# EAGLE board DualBalancedInput (EAGLE 7.5.0)
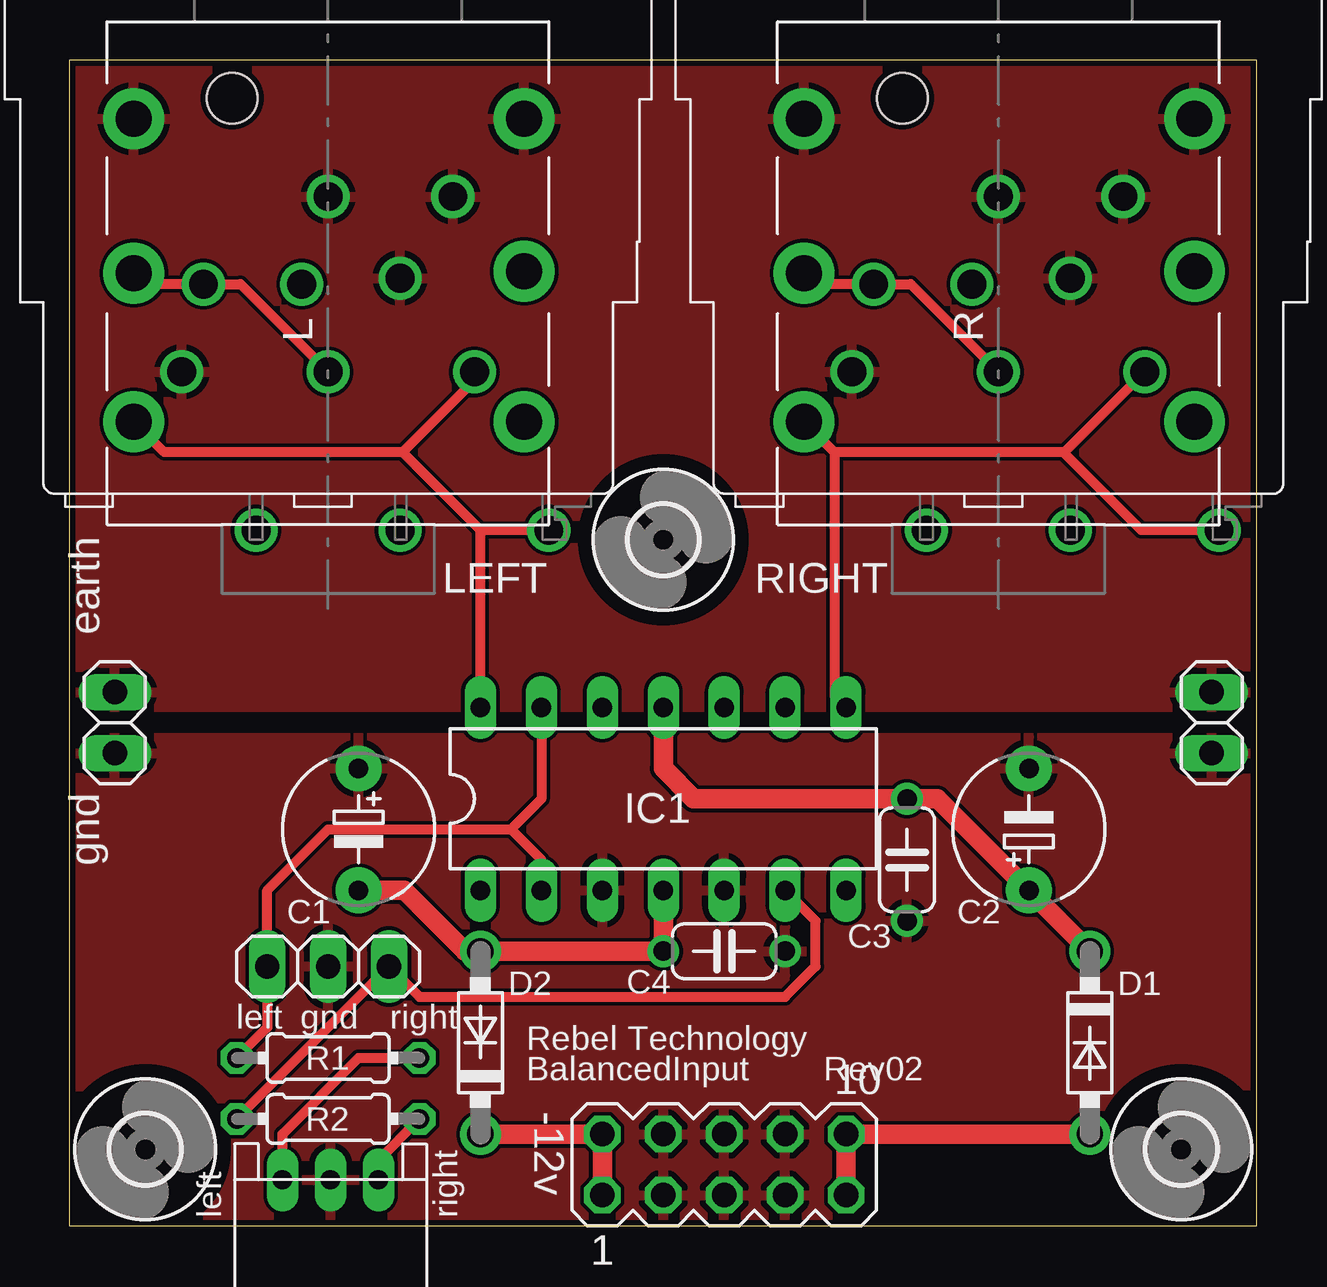
[diagram p0: board, top side]
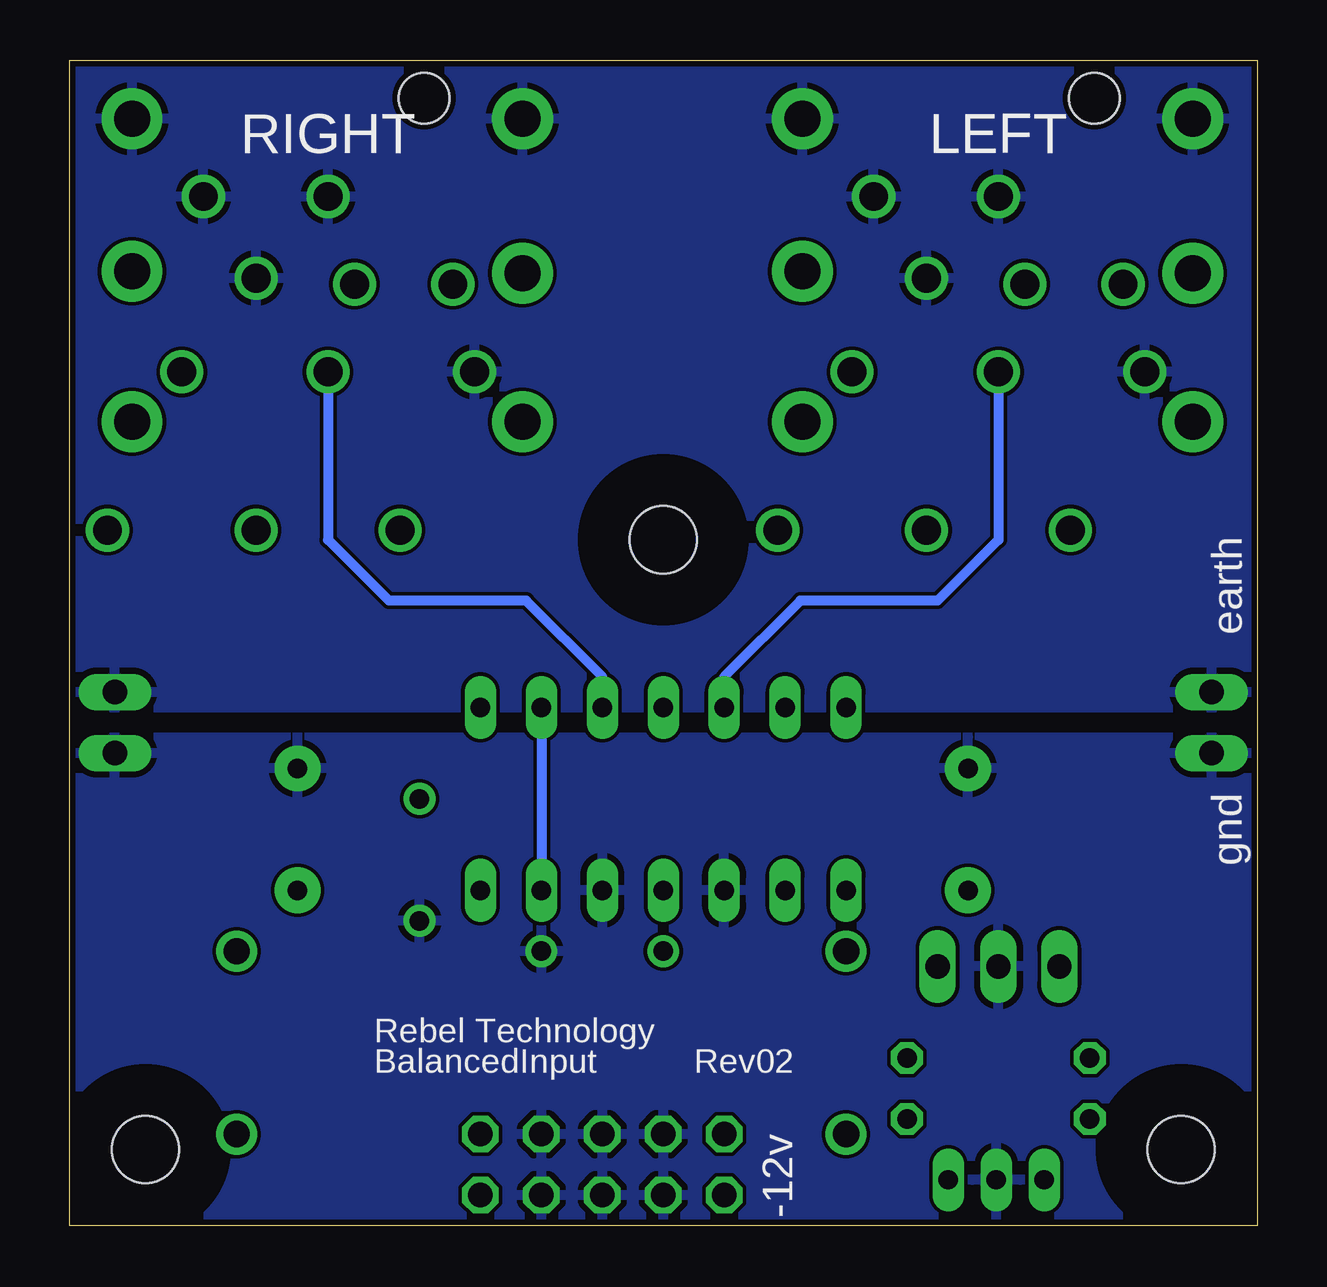
[diagram p1: board, bottom side, seen from below]

Size 49.51 x 48.56 mm. Coordinates in mm from the lower left corner, seen from the top.
Outline: 0,0 49.51,0 49.51,48.56 0,48.56 0,0
Copper layers (1*16): Top 0.035mm / dielectric 1.5mm / Bottom 0.035mm
Design rules "Fusion_eagle_rule_v1.1": minimum track width 6mil, minimum drill 12mil, track to track 6mil, track to pad 6mil, pad to pad 6mil, via to via 6mil, smd to smd 0mil, copper to edge 10mil, drill to drill 10mil, minimum pad ring 10mil, minimum via ring 6mil, stop-mask expansion 2mil, vias tented up to drill 100mil, thermal gap 10mil

## Footprints (pad centres in the part's own frame; a part is rotated, then mirrored left to right if it is on the bottom)
E5-6 = drill 0.813 pad 1.905: + -2.54,0; - 2.54,0
C050-024X044 = drill 0.813: 1 -2.54,0; 2 2.54,0
DO41-7.6 = drill 1.1 pad 1.7: A 3.81,0; C -3.81,0
DIL14 = drill 0.813 long: 1 -7.62,-3.81; 2 -5.08,-3.81; 3 -2.54,-3.81; 4 0,-3.81; 5 2.54,-3.81; 6 5.08,-3.81; 7 7.62,-3.81; 8 7.62,3.81; 9 5.08,3.81; 10 2.54,3.81; 11 0,3.81; 12 -2.54,3.81; 13 -5.08,3.81; 14 -7.62,3.81
CON-JST_PH_3W = drill 0.8 long: P1 0,0; P2 -2,0; P3 -4,0
1X02 = drill 1.016 long: 1 -1.27,0; 2 1.27,0
1X03 = drill 1.016 long: 1 -2.54,0; 2 0,0; 3 2.54,0
NMJ6HCD2 = drill 1.5 pad 2.54: R -0.318,8.096; RN -0.238,-8.176; S 6.112,8.096; SN 6.112,-8.176; T -6.509,8.096; TN -6.509,-8.176
NCJ10FI-H = drill 1.2: 1 -6.1,-18.4; 2 6.1,-18.4; 3 0,-18.4; G 0,-11.1; GN -1.1,-14.75; R -5.2,-14.75; RS -3,-25; S 5.2,-11.1; SS 3,-14.5; T 9.2,-25; TS 3,-25 | hole 2.1: -4,-7
0204/7 = drill 0.813 octagon: 1 -3.81,0; 2 3.81,0
MA05-2 = drill 1.016 octagon: 1 -5.08,-1.27; 2 -5.08,1.27; 3 -2.54,-1.27; 4 -2.54,1.27; 5 0,-1.27; 6 0,1.27; 7 2.54,-1.27; 8 2.54,1.27; 9 5.08,-1.27; 10 5.08,1.27
2,8 = hole 2.8: 0,0

## Placement (x,y rotation side)
C1  10u  [E5-6]  12.06,16.51 270 top
C2  10u  [E5-6]  40.01,16.51 90 top
C3  100n  [C050-024X044]  34.92,15.24 270 top
C4  100n  [C050-024X044]  27.3,11.43 0 top
D1  1N5817  [DO41-7.6]  42.55,7.62 270 top
D2  1N5817  [DO41-7.6]  17.14,7.62 90 top
IC1  INA2137P  [DIL14]  24.77,17.78 0 top
J1  CON-JST_PH_3W  [CON-JST_PH_3W]  8.89,1.91 180 top
JP1  [1X02]  1.91,20.95 270 top
JP2  [1X03]  10.79,10.79 180 top
JP3  [1X02]  47.62,20.95 270 top
L  NEUTRIK_NMJ6HCD2  [NMJ6HCD2]  10.79,40.01 90 top
LEFT  NCJ10FI-H  [NCJ10FI-H]  10.79,53.98 0 top
R  NEUTRIK_NMJ6HCD2  [NMJ6HCD2]  38.73,40.01 90 top
R1  100R  [0204/7]  10.79,6.99 0 top
R2  100R  [0204/7]  10.79,4.45 0 top
RIGHT  NCJ10FI-H  [NCJ10FI-H]  38.73,53.98 0 top
SV1  [MA05-2]  27.3,2.54 0 top
U$1  [2,8]  3.17,3.17 0 top
U$2  [2,8]  46.35,3.17 0 top
U$3  [2,8]  24.77,28.57 0 top

## Library data of the parts
C1-C4 = rcl
D1 D2 = diode
IC1 = burr-brown; MF: TEXAS INSTRUMENT CONNECTORS; MPN: INA2137PA; OC_FARNELL: unknown; OC_NEWARK: 18M9116
J1 R1 R2 = Rebel
JP1-JP3 = pinhead
L R = neutrik_jacks
LEFT RIGHT = con-neutrik_ag; OC_FARNELL: unknown; OC_NEWARK: unknown
SV1 = con-lstb; OC_FARNELL: unknown; OC_NEWARK: unknown
U$1-U$3 = holes

## Nets
+12V: C2.+ C3.1 D1.C IC1.11
-12V: C1.- C4.1 D2.A IC1.4
GND: C1.+ C2.- C3.2 C4.2 IC1.3 IC1.5 J1.P2 JP1.2 JP2.2 JP3.2 SV1.3 SV1.4 SV1.5 SV1.6 SV1.7 SV1.8
GNDA: JP1.1 JP3.1 L.S L.SN LEFT.1 LEFT.G LEFT.S LEFT.SS R.S R.SN RIGHT.1 RIGHT.G RIGHT.S RIGHT.SS
IN_LEFT: IC1.2 IC1.13 JP2.3 R1.1
IN_RIGHT: IC1.6 IC1.9 JP2.1 R2.1
N$1: IC1.14 L.T LEFT.2 LEFT.T
N$2: IC1.12 L.R LEFT.3 LEFT.R
N$5: D2.C SV1.1 SV1.2
N$6: D1.A SV1.9 SV1.10
N$7: J1.P3 R2.2
N$9: J1.P1 R1.2
N$18: IC1.8 R.T RIGHT.2 RIGHT.T
N$19: IC1.10 R.R RIGHT.3 RIGHT.R

## Tracks (layer width: path | path; a pad name or v marks a point on that pad's centre or on a via)
+12V
  Top 0.813: IC1.11 24.77,19.05 26.04,17.78 C3.1 36.2,17.78 C2.+ D1.C
-12V
  Top 0.813: IC1.4 C4.1 D2.A 16.51,11.43 13.97,13.97 C1.-
GND
  pour Bottom: -4.45,20.32 59.05,20.32 59.05,-3.17 -4.45,-3.17
  pour Top: -5.71,20.32 57.78,20.32 57.78,-3.17 -5.71,-3.17
GNDA
  pour Bottom: -4.45,21.59 -4.45,51.44 59.05,51.44 59.05,21.59
  pour Top: -5.71,21.59 -5.71,51.44 57.78,51.44 57.78,21.59
IN_LEFT
  Top 0.406: 18.41,16.51 10.79,16.51 8.26,13.97 JP2.3 8.26,8.26 R1.1 | 18.41,16.51 19.68,15.24 IC1.2 | IC1.13 19.68,17.78 18.41,16.51
IN_RIGHT
  Top 0.406: R2.1 JP2.1 14.61,9.53 29.84,9.53 31.11,10.79 31.11,12.7 IC1.6
  Bottom 0.406: IC1.9 IC1.6
N$1
  Top 0.406: LEFT.T 17.14,28.98 | IC1.14 17.14,28.98 | 13.89,32.23 17.14,28.98 | LEFT.2 16.89,35.23 13.89,32.23 | 13.89,32.23 3.97,32.23 L.T
N$2
  Top 0.406: L.R 3.19,39.23 LEFT.R 7.14,39.23 LEFT.3
  Bottom 0.406: LEFT.3 10.79,28.57 13.34,26.04 19.05,26.04 22.23,22.86 IC1.12
N$5
  Top 0.813: SV1.1 SV1.2 D2.C
N$6
  Top 0.813: SV1.9 SV1.10 D1.A
N$7
  Top 0.406: J1.P3 12.89,2.73 R2.2
N$9
  Top 0.406: J1.P1 8.89,3.81 12.06,6.99 R1.2
N$18
  Top 0.406: 41.49,32.23 RIGHT.2 | 41.49,32.23 41.49,32.17 44.69,28.98 RIGHT.T | 41.49,32.23 31.91,32.23 | 31.91,32.23 31.91,22.07 IC1.8 | 31.91,32.23 R.T
N$19
  Top 0.406: R.R 31.13,39.23 RIGHT.R 35.09,39.23 RIGHT.3
  Bottom 0.406: RIGHT.3 38.73,28.57 36.2,26.04 30.48,26.04 27.3,22.86 IC1.10

## Text on the board
tPlace: earth | gnd | left | gnd | right | Rebel Technology | BalancedInput | Rev02 | -12v | left | right
bPlace: LEFT | RIGHT | earth | gnd | Rebel Technology | Rev02 | BalancedInput | -12v